# EAGLE board ULA (EAGLE 6.3)
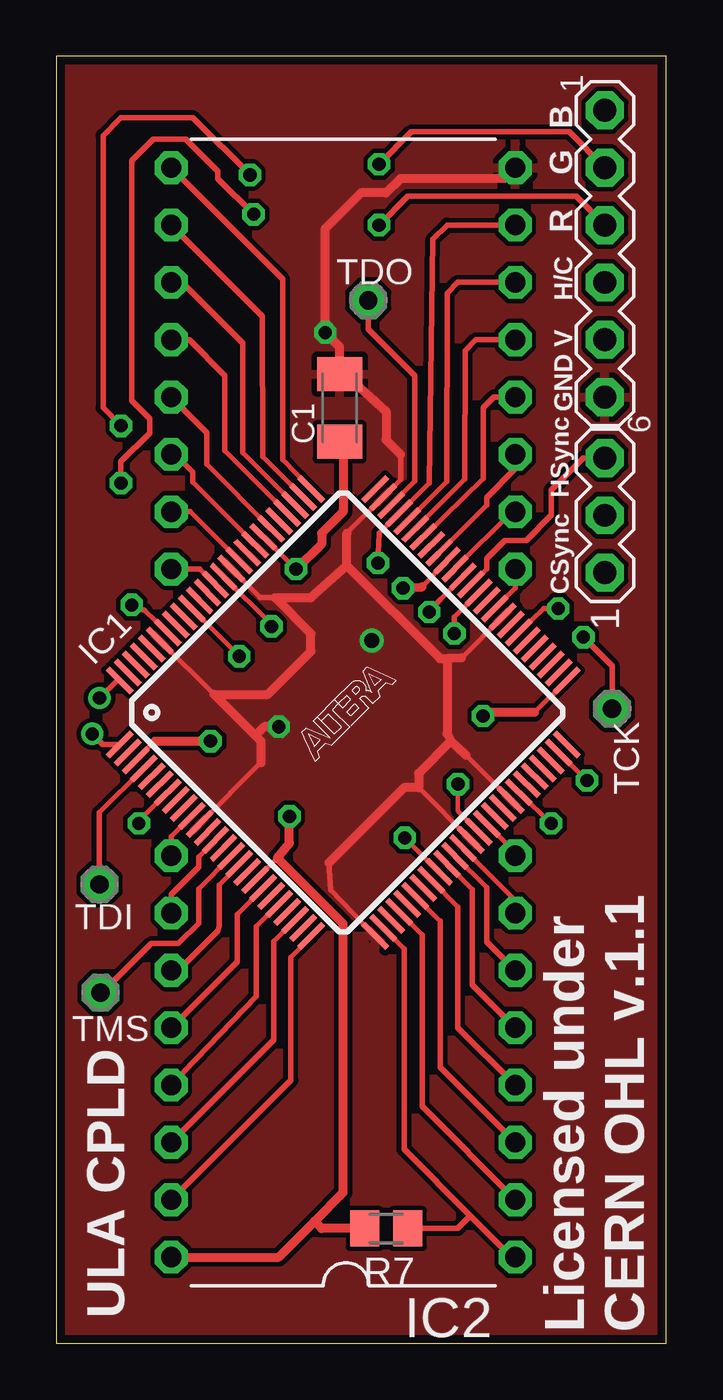
[diagram p0: board, top side]
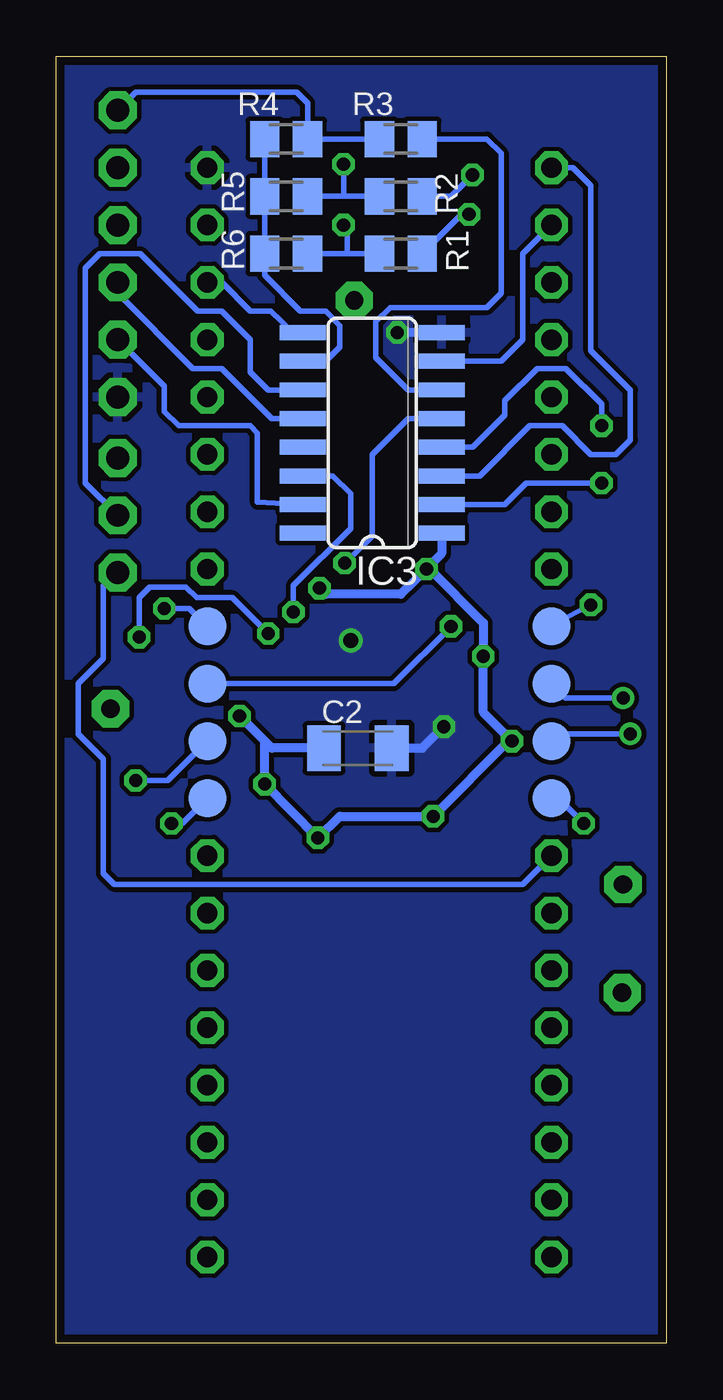
[diagram p1: board, bottom side, seen from below]

Size 27 x 57 mm. Coordinates in mm from the lower left corner, seen from the top.
Outline: 0,0 27,0 27,57 0,57 0,0
Copper layers (1*16): Top 0.035mm / dielectric 1.5mm / Bottom 0.035mm
Design rules "placnel *": minimum track width 8mil, minimum drill 23mil, track to track 8mil, track to pad 8mil, pad to pad 8mil, via to via 10mil, smd to smd 10mil, copper to edge 15mil, drill to drill 8mil, minimum pad ring 10mil, minimum via ring 8mil, stop-mask expansion 4mil, vias tented up to drill 0mil, thermal gap 10mil
Net classes: 0 default: width 0.254 mm, drill 0.584 mm, clearance 0.203 mm; 1 Power: width 0.406 mm, drill 0.584 mm, clearance 0.203 mm

## Footprints (pad centres in the part's own frame; a part is rotated, then mirrored left to right if it is on the bottom)
C1206K = smd 1.5 x 2: 1 -1.5,0; 2 1.5,0
TQFP100 = smd 1.5 x 0.25: 1 -8,6; 2 -8,5.5; 3 -8,5; 4 -8,4.5; 5 -8,4; 6 -8,3.5; 7 -8,3; 8 -8,2.5; 9 -8,2; 10 -8,1.5; 11 -8,1; 12 -8,0.5; 13 -8,0; 14 -8,-0.5; 15 -8,-1; 16 -8,-1.5; 17 -8,-2; 18 -8,-2.5; 19 -8,-3; 20 -8,-3.5; 21 -8,-4; 22 -8,-4.5; 23 -8,-5; 24 -8,-5.5; 25 -8,-6; 51 8,-6; 52 8,-5.5; 53 8,-5; 54 8,-4.5; 55 8,-4; 56 8,-3.5; 57 8,-3; 58 8,-2.5; 59 8,-2; 60 8,-1.5; 61 8,-1; 62 8,-0.5; 63 8,0; 64 8,0.5; 65 8,1; 66 8,1.5; 67 8,2; 68 8,2.5; 69 8,3; 70 8,3.5; 71 8,4; 72 8,4.5; 73 8,5; 74 8,5.5; 75 8,6 | smd 0.25 x 1.5: 26 -6,-8; 27 -5.5,-8; 28 -5,-8; 29 -4.5,-8; 30 -4,-8; 31 -3.5,-8; 32 -3,-8; 33 -2.5,-8; 34 -2,-8; 35 -1.5,-8; 36 -1,-8; 37 -0.5,-8; 38 0,-8; 39 0.5,-8; 40 1,-8; 41 1.5,-8; 42 2,-8; 43 2.5,-8; 44 3,-8; 45 3.5,-8; 46 4,-8; 47 4.5,-8; 48 5,-8; 49 5.5,-8; 50 6,-8; 76 6,8; 77 5.5,8; 78 5,8; 79 4.5,8; 80 4,8; 81 3.5,8; 82 3,8; 83 2.5,8; 84 2,8; 85 1.5,8; 86 1,8; 87 0.5,8; 88 0,8; 89 -0.5,8; 90 -1,8; 91 -1.5,8; 92 -2,8; 93 -2.5,8; 94 -3,8; 95 -3.5,8; 96 -4,8; 97 -4.5,8; 98 -5,8; 99 -5.5,8; 100 -6,8
DIL40 = drill 0.9 pad 1.448 octagon: 1 -24.13,-7.62; 2 -21.59,-7.62; 3 -19.05,-7.62; 4 -16.51,-7.62; 5 -13.97,-7.62; 6 -11.43,-7.62; 7 -8.89,-7.62; 8 -6.35,-7.62; 13 6.35,-7.62; 14 8.89,-7.62; 15 11.43,-7.62; 16 13.97,-7.62; 17 16.51,-7.62; 18 19.05,-7.62; 19 21.59,-7.62; 20 24.13,-7.62; 21 24.13,7.62; 22 21.59,7.62; 23 19.05,7.62; 24 16.51,7.62; 25 13.97,7.62; 26 11.43,7.62; 27 8.89,7.62; 28 6.35,7.62; 33 -6.35,7.62; 34 -8.89,7.62; 35 -11.43,7.62; 36 -13.97,7.62; 37 -16.51,7.62; 38 -19.05,7.62; 39 -21.59,7.62; 40 -24.13,7.62 | smd 1.676 x 1.676 bottom: 9 -3.81,-7.62; 10 -1.27,-7.62; 11 1.27,-7.62; 12 3.81,-7.62; 29 3.81,7.62; 30 1.27,7.62; 31 -1.27,7.62; 32 -3.81,7.62
SO16 = smd 0.66 x 2.032: 1 -4.445,-3.073; 2 -3.175,-3.073; 3 -1.905,-3.073; 4 -0.635,-3.073; 5 0.635,-3.073; 6 1.905,-3.073; 7 3.175,-3.073; 8 4.445,-3.073; 9 4.445,3.073; 10 3.175,3.073; 11 1.905,3.073; 12 0.635,3.073; 13 -0.635,3.073; 14 -1.905,3.073; 15 -3.175,3.073; 16 -4.445,3.073
M0805 = smd 1.3 x 1.6: 1 -0.95,0; 2 0.95,0
MA03-1-1 = drill 1.016 pad 1.676 octagon: 1 -2.54,0; 2 0,0; 3 2.54,0
MA06-1-1 = drill 1.016 pad 1.676 octagon: 1 -6.35,0; 2 -3.81,0; 3 -1.27,0; 4 1.27,0; 5 3.81,0; 6 6.35,0
P1-10 = drill 0.813 pad 1.651 octagon: TP 0,0

## Placement (x,y rotation side)
C1  100n  [C1206K]  12.54,41.43 90 top
C2  100n  [C1206K]  13.65,26.35 0 bottom
IC1  EPM7128  [TQFP100]  12.7,27.94 45 top
IC2  Soquete ULA  [DIL40]  12.7,27.94 90 top
IC3  4050D  [SO16]  13.02,40.32 90 bottom
R1  100  [M0805]  11.75,48.26 180 bottom
R2  100  [M0805]  11.75,50.8 180 bottom
R3  100  [M0805]  11.75,53.34 180 bottom
R4  1k5  [M0805]  16.83,53.34 0 bottom
R5  1k5  [M0805]  16.83,50.8 0 bottom
R6  1k5  [M0805]  16.83,48.26 0 bottom
R7  10K  [M0805]  14.61,5.08 180 top
SJ1  SELSYNC  [MA03-1-1]  24.29,36.67 90 top
SV1  [MA06-1-1]  24.29,48.26 270 top
TCK  PTR1PAD1-10  [P1-10]  24.61,28.1 0 top
TDI  PTR1PAD1-10  [P1-10]  1.91,20.32 0 top
TDO  PTR1PAD1-10  [P1-10]  13.81,46.2 0 top
TMS  PTR1PAD1-10  [P1-10]  1.95,15.53 0 top

## Library data of the parts
C1 C2 = rcl2
IC1 = altera2; MPN: EPM7128STC100-7N; OC_FARNELL: 1549427; OC_NEWARK: 51R9778
IC2 = soquete_dip40
IC3 = 40xx
R1-R7 = rcl
SJ1 SV1 = con-lstb2
TCK TDI TDO TMS = testpad2

## Nets
50/60: IC1.27 IC2.1 R7.1
/CAS: IC1.57 IC2.12
/CS: IC1.29 IC2.2
/INT: IC1.13 IC2.34
/MREQ: IC1.67 IC2.15
/RAS: IC1.60 IC2.13
/RD: IC1.70 IC2.17
/VRAMWR: IC1.65 IC2.14
/WR: IC1.69 IC2.16
A0: IC1.31 IC2.3
A1: IC1.33 IC2.4
A2: IC1.35 IC2.5
A3: IC1.36 IC2.6
A4: IC1.37 IC2.7
A5: IC1.40 IC2.8
A6: IC1.44 IC2.9
A14: IC1.21 IC2.37
A15: IC1.23 IC2.38
BLUE: IC1.77 IC2.22 IC3.7
BRIGHT: IC1.71 IC2.18 IC3.9
BURSTGATE: IC1.16 IC2.35
CLK: IC1.87 IC2.11
CLKCPU: IC1.19 IC2.36
D0: IC1.81 IC2.25
D1: IC1.83 IC2.26
D2: IC1.85 IC2.27
D3: IC1.88 IC2.28
D4: IC1.94 IC2.29
D5: IC1.100 IC2.30
D6: IC1.1 IC2.31
D7: IC1.7 IC2.32
GND [Power]: C1.2 C2.2 IC1.11 IC1.26 IC1.38 IC1.43 IC1.59 IC1.74 IC1.86 IC1.95 IC2.20 IC3.8 SV1.6
GREEN: IC1.72 IC2.19 IC3.5
HSYNC: IC1.63 SJ1.3
KEYB: IC1.49 IC2.10
MIC: IC1.78 IC2.23
N$1: IC3.2 R1.1
N$2: IC3.4 R2.1
N$3: IC3.6 R3.1
N$4: R3.2 R4.2 SV1.1
N$5: R2.2 R5.2 SV1.2
N$6: IC1.4 TDI.TP
N$7: IC1.15 TMS.TP
N$8: IC1.73 TDO.TP
N$9: IC1.62 TCK.TP
N$10: R1.2 R6.2 SV1.3
N$11: IC3.10 R4.1 R5.1 R6.1
N$12: IC3.11 SJ1.2
N$13: IC3.12 SV1.4
N$14: IC3.15 SV1.5
RED: IC1.76 IC2.21 IC3.3
SOUND: IC1.79 IC2.24
SUBCARRIER: IC1.25 IC2.39
SYNC: IC1.10 IC2.33 SJ1.1
VCC [Power]: C1.1 C2.1 IC1.3 IC1.18 IC1.34 IC1.39 IC1.51 IC1.66 IC1.82 IC1.91 IC2.40 IC3.1 R7.2
VSYNC: IC1.64 IC3.14

## Tracks (layer width: path | path; a pad name or v marks a point on that pad's centre or on a via)
50/60
  Top 0.208: IC1.27 14.57,18.31 15.4,17.45
  Top 0.254: IC2.1 20.16,3.81 18.34,5.64 | 18.34,5.64 15.4,8.57 15.4,17.45 | R7.1 17.78,5.08 18.34,5.64
/CAS  (via drill 0.58)
  Top 0.208: IC1.57 20.55,31.55 21.59,32.54
  Top 0.254: 21.59,32.54 v22.23,32.54
  Bottom 0.254: v22.23,32.54 21.11,32.54 IC2.12
/CS
  Top 0.208: 16.19,18.08 IC1.29
  Top 0.254: IC2.2 16.19,10.48 16.19,18.08
/INT
  Top 0.208: 6.3,21.54 IC1.13
  Top 0.254: IC2.34 5.08,19.88 6.3,21.1 6.3,21.54
/MREQ
  Top 0.208: IC1.67 19.05,37.12
  Top 0.254: 19.05,37.12 19.05,37.47 20.32,38.73 IC2.15
/RAS
  Top 0.208: 20.32,33.44 IC1.60
  Top 0.254: IC2.13 20.32,33.44
/RD
  Top 0.208: IC1.70 15.91,36.1 18.07,38.28
  Top 0.254: 18.07,38.28 18.1,43.97 18.57,44.45 IC2.17
/VRAMWR
  Top 0.208: IC1.65 20.18,36.83
  Top 0.254: 20.18,36.83 IC2.14
/WR
  Top 0.208: IC1.69 16.26,35.74 18.89,38.29
  Top 0.254: 18.89,38.29 18.89,41.43 19.37,41.91 IC2.16
A0
  Top 0.208: 16.99,18.7 16.91,18.78 IC1.31
  Top 0.254: IC2.3 16.99,12.22 16.99,18.7
A1
  Top 0.208: 17.78,19.32 IC1.33
  Top 0.254: IC2.4 17.78,13.97 17.78,19.32
A2
  Top 0.208: 18.41,20.1 IC1.35
  Top 0.254: IC2.5 18.41,15.88 18.41,20.1
A3
  Top 0.208: 19.05,20.18 IC1.36
  Top 0.254: IC2.6 19.05,17.78 19.05,20.18
A4
  Top 0.208: 20.32,19.61 IC1.37
  Top 0.254: IC2.7 20.32,19.61
A5
  Top 0.208: IC2.8 20.32,21.73 IC1.40
A6  (via drill 0.58)
  Top 0.208: IC1.44 20.52,24.35 v21.91,23.02
  Bottom 0.254: v21.91,23.02 21.43,23.02 IC2.9
A14
  Top 0.208: 8.86,18.46 9.86,19.45 IC1.21
  Top 0.254: IC2.37 8.86,15.37 8.86,18.46
A15
  Top 0.208: 9.62,17.79 IC1.23
  Top 0.254: IC2.38 9.62,13.43 9.62,17.79
BLUE
  Top 0.208: IC1.77 9.14,39.28
  Top 0.254: 9.14,39.28 9.12,45.49 IC2.22
  Bottom 0.254: IC3.7 7.3,43.5 6.35,44.45 6.35,48.26 IC2.22
BRIGHT
  Top 0.208: IC1.71 15.61,36.48 17.28,38.18
  Top 0.254: 17.28,38.18 17.3,46.51 17.78,46.99 IC2.18
  Bottom 0.254: IC3.9 16.51,44.77 17.52,45.72 18.41,45.72 19.68,46.99 IC2.18
BURSTGATE
  Top 0.208: 7.2,20.3 8.1,21.2 IC1.16
  Top 0.254: IC2.35 5.4,16.51 7.14,18.26 7.2,18.47 7.2,20.3
CLK  (via drill 0.58)
  Top 0.208: 9.53,31.82 IC1.87
  Top 0.254: v9.53,31.75 9.53,31.82
  Bottom 0.254: IC2.11 12.06,29.21 v9.53,31.75
CLKCPU
  Top 0.208: 8,19 IC1.19
  Top 0.254: IC2.36 8,16.89 8,19
D0
  Top 0.208: IC1.81 6.66,38.93
  Top 0.254: IC2.25 6.66,40.33 6.66,38.93
D1
  Top 0.208: IC1.83 6.03,38.14
  Top 0.254: 6.03,38.14 6.03,38.58 5.24,39.37 IC2.26
D2
  Top 0.208: IC1.85 5.93,36.83
  Top 0.254: 5.93,36.83 IC2.27
D3
  Top 0.208: IC1.88 6.35,34.29
  Top 0.254: 6.35,34.29 IC2.28
D4  (via drill 0.58)
  Top 0.208: IC1.94 4.9,31.5 3.92,32.46
  Top 0.254: 3.92,32.46 v3.33,32.7
  Bottom 0.208: 4.92,31.91 IC2.29
  Bottom 0.254: v3.33,32.7 4.92,31.91
D5  (via drill 0.58)
  Top 0.208: IC1.100 2.68,29.35
  Top 0.254: 2.68,29.35 v1.91,28.57
  Bottom 0.254: v1.91,28.57 4.45,28.57 IC2.30
D6  (via drill 0.58)
  Top 0.254: IC1.1 2.05,26.53 v1.59,26.99
  Bottom 0.254: v1.59,26.99 4.76,26.99 IC2.31
D7  (via drill 0.58)
  Top 0.208: 3.65,23.13 IC1.7
  Top 0.254: v3.65,23.02 3.65,23.13
  Bottom 0.254: IC2.32 4.76,24.13 v3.65,23.02
GND  (via drill 0.58, 0.58 pad 0.25, 0.66)
  Top 0.208: IC1.95 4.6,31.1 6.99,28.73 | 9.05,25.72 6.34,23 IC1.11 | IC1.86 9.03,33.02 | 12.86,35.88 IC1.74 15.24,38.26 | IC1.59 17.94,30.35 | IC1.43 18.14,26.04 | 12.14,20.09 14.14,17.98 IC1.26 14.2,17.95 | 16.03,24.61 IC1.38 | 16.03,24.61
  Top 0.254: 9.68,33.02 9.03,33.02 | 12.06,21.27 12.14,20.09 | 15.24,39.37 15.24,38.26
  Top 0.406: 8.81,26.91 6.99,28.73 9.37,28.73 11.27,30.64 11.27,31.43 9.68,33.02 11.27,33.02 12.86,34.45 | 8.81,26.91 9.05,26.67 9.05,25.72 | 12.86,34.45 12.86,35.88 | 12.86,34.45 16.99,30.32 17.3,30.32 | 17.94,30.35 17.3,30.32 | 17.3,30.32 17.3,26.99 17.46,26.67 | 18.14,26.04 17.46,26.67 | 17.46,26.67 16.03,25.24 16.03,24.61 15.4,24.61 12.06,21.27 | 15.24,39.37 14.61,40.01 14.61,41.27 12.95,42.77 C1.2 12.54,44.13 v11.91,44.77 11.91,49.37 13.49,50.96 14.61,50.96 15.24,51.59 19.84,51.59 IC2.20 | v9.84,27.3 9.21,27.3 8.81,26.91
  Bottom 0.406: IC3.8 v11.91,44.77 | C2.2 10.79,26.35 v9.84,27.3
  other vias: 13.97,31.11
  pour Top: -1,58 -1,-1 28,-1 28,58
  pour Bottom: -1.64,58.32 28.32,58.32 28.32,-1.32 -1.32,-1.32
GREEN  (via drill 0.58)
  Top 0.208: 16.51,38.1 15.19,36.78 IC1.72 14.29,35.89
  Top 0.254: 16.51,38.1 16.67,48.9 17.3,49.53 IC2.19 | v14.24,34.56 14.29,35.89
  Bottom 0.254: IC3.5 11.43,40.96 13.02,39.37 13.02,35.72 v14.24,34.56
HSYNC
  Top 0.208: IC1.63 19.05,34.29
  Top 0.254: 19.05,34.29 19.05,34.77 19.84,35.56 20.8,35.56 21.91,36.67 21.91,37.78 23.34,39.21 SJ1.3
KEYB  (via drill 0.58)
  Top 0.208: IC1.49 v23.5,24.92
  Bottom 0.254: v23.5,24.92 22.07,24.92 IC2.10
MIC
  Top 0.208: IC1.78 8.26,39.46
  Top 0.254: 8.26,39.46 8.26,44.29 5.56,46.99 IC2.23
N$1  (via drill 0.58)
  Top 0.254: v2.86,38.1 2.86,39.05 4.13,40.32 4.13,40.96 3.33,41.75 3.33,52.39 4.29,53.34 5.71,53.34 7.14,51.91 7.14,51.59 v8.73,50.01
  Bottom 0.254: IC3.2 7.14,37.15 6.19,38.1 v2.86,38.1 | v8.73,50.01 9.05,50.01 R1.1
N$2  (via drill 0.58)
  Top 0.254: v8.57,51.75 6.03,54.29 2.86,54.29 2.06,53.5 2.06,41.43 v2.86,40.64
  Bottom 0.254: R2.1 9.53,50.8 v8.57,51.75 | v2.86,40.64 2.86,41.59 4.45,43.18 5.71,43.18 7.14,41.75 7.14,41.12 8.57,39.69 IC3.4
N$3
  Bottom 0.254: R3.1 7.94,53.34 7.3,52.7 7.3,46.51 7.94,45.88 12.22,45.88 12.86,45.24 12.86,43.66 11.43,42.23 IC3.6
N$4
  Bottom 0.254: R3.2 R4.2 15.88,54.93 16.35,55.4 23.5,55.4 SV1.1
N$5  (via drill 0.58 pad 0.25)
  Top 0.254: v14.29,52.23 15.72,53.66 22.7,53.66 SV1.2
  Bottom 0.254: R2.2 14.29,50.8 | 14.29,50.8 R5.2 | 14.29,50.8 v14.29,52.23
N$6
  Top 0.208: 1.91,23.51 IC1.4
  Top 0.254: TDI.TP 1.91,23.51
N$7
  Top 0.208: TMS.TP 2.02,15.53 | 6.3,20.13 IC1.15
  Top 0.254: 2.02,15.53 4.2,17.7 5.4,17.7 6.3,18.6 6.3,20.13
N$8
  Top 0.208: IC1.73 15.88,38.19
  Top 0.254: 15.88,38.19 15.88,42.86 13.81,44.93 TDO.TP
N$9  (via drill 0.58 pad 0.25)
  Top 0.208: IC1.62 17.62,32.15
  Top 0.254: 17.62,32.15 v17.62,31.43 | v23.34,31.27 24.61,30 TCK.TP
  Bottom 0.254: v17.62,31.43 19.21,33.02 20.8,33.02 21.27,33.5 22.86,33.5 23.34,33.02 v23.34,31.27
N$10  (via drill 0.58 pad 0.25)
  Top 0.254: v14.29,49.53 15.56,50.8 23.02,50.8 SV1.3
  Bottom 0.254: R1.2 14.13,48.26 | 14.13,48.26 R6.2 15.56,48.26 | v14.29,49.53 14.13,49.37 14.13,48.26
N$11
  Bottom 0.254: IC3.10 15.08,43.5 14.45,44.13 14.45,45.09 15.08,45.72 16.19,45.72 17.78,47.3 R6.1 R5.1 R4.1
N$12
  Bottom 0.254: SJ1.2 25.72,38.1 25.72,47.62 25.08,48.26 23.28,48.26 20.74,45.72 19.68,45.72 18.41,44.45 18.41,43.02 17.62,42.23 IC3.11
N$13
  Bottom 0.254: IC3.12 17.46,40.96 19.68,43.18 20.95,43.18 24.29,46.51 SV1.4
N$14
  Bottom 0.254: IC3.15 18.1,37.25 18.1,40.32 18.41,40.64 21.59,40.64 22.23,41.27 22.23,42.39 SV1.5
RED
  Top 0.208: IC1.76 11.26,37.87 10.02,39.13
  Top 0.254: 10.02,39.13 10.02,47.13 IC2.21
  Bottom 0.254: IC2.21 4.13,52.07 3.33,51.28 3.33,43.97 1.59,42.23 1.59,40.01 2.22,39.37 3.33,39.37 4.6,40.64 6.03,40.64 8.26,38.42 IC3.3
SOUND
  Top 0.208: IC1.79 7.46,39.54
  Top 0.254: 7.46,39.54 7.46,42.86 5.87,44.45 IC2.24
SUBCARRIER
  Top 0.208: 10.38,17.08 11.29,17.99 IC1.25
  Top 0.254: IC2.39 10.38,11.65 10.38,17.08
SYNC
  Top 0.208: 5.08,22.44 IC1.10
  Top 0.254: IC2.33 5.08,22.44
  Bottom 0.254: SJ1.1 24.92,33.56 24.92,30.32 26.04,29.21 26.04,26.99 24.92,25.88 24.92,20.8 24.45,20.32 6.35,20.32 IC2.33
VCC  (via drill 0.58)
  Top 0.208: IC1.18 8.86,20.56 9.79,21.48 | IC1.3 4.36,26.67 | v8.1,30.43 6.19,32.33 IC1.91 | 16.19,33.5 17.04,34.42 IC1.66 | v10.61,34.29 9.23,35.64 IC1.82 | IC1.39 17.78,23.57 v17.78,24.77 | v15.42,22.38 16.91,20.89 IC1.34 | IC1.51 22.53,29.28 21.16,27.94
  Top 0.406: 4.36,26.67 v6.83,26.67 | v15.35,33.45 16.19,33.5 | v10.32,23.34 10.32,22.14 9.79,21.48 12.7,18.57 12.7,6.67 11.43,5.4 | 21.16,27.94 19.05,27.94 v18.89,27.78 | C1.1 12.7,39.69 12.7,36.83 11.75,35.88 11.75,35.4 v10.61,34.29 | IC2.40 9.84,3.81 11.43,5.4 | R7.2 11.75,5.08 11.43,5.4
  Bottom 0.406: v10.61,34.29 10.48,34.29 8.1,31.91 v8.1,30.43 8.1,27.94 v6.83,26.67 6.99,26.67 v10.32,23.34 14.45,23.34 v15.42,22.38 v17.78,24.77 17.78,26.67 | IC3.1 9.94,34.98 v10.61,34.29 | 17.78,26.67 v18.89,27.78 | C2.1 17.46,26.35 17.78,26.67 | v10.61,34.29 11.75,33.18 15.08,33.18 v15.35,33.45
VSYNC  (via drill 0.58)
  Top 0.208: IC1.64 16.99,32.93
  Top 0.254: 16.99,32.93 v16.51,32.38
  Bottom 0.254: IC3.14 14.76,38.42 13.97,37.62 13.97,36.09 16.51,33.55 v16.51,32.38

## Text on the board
tPlace: B | G | R | H/C | V | GND | HSync | CSync | ULA CPLD | Licensed under / CERN OHL v.1.1